# EAGLE board fitnessband (EAGLE 7.4.0)
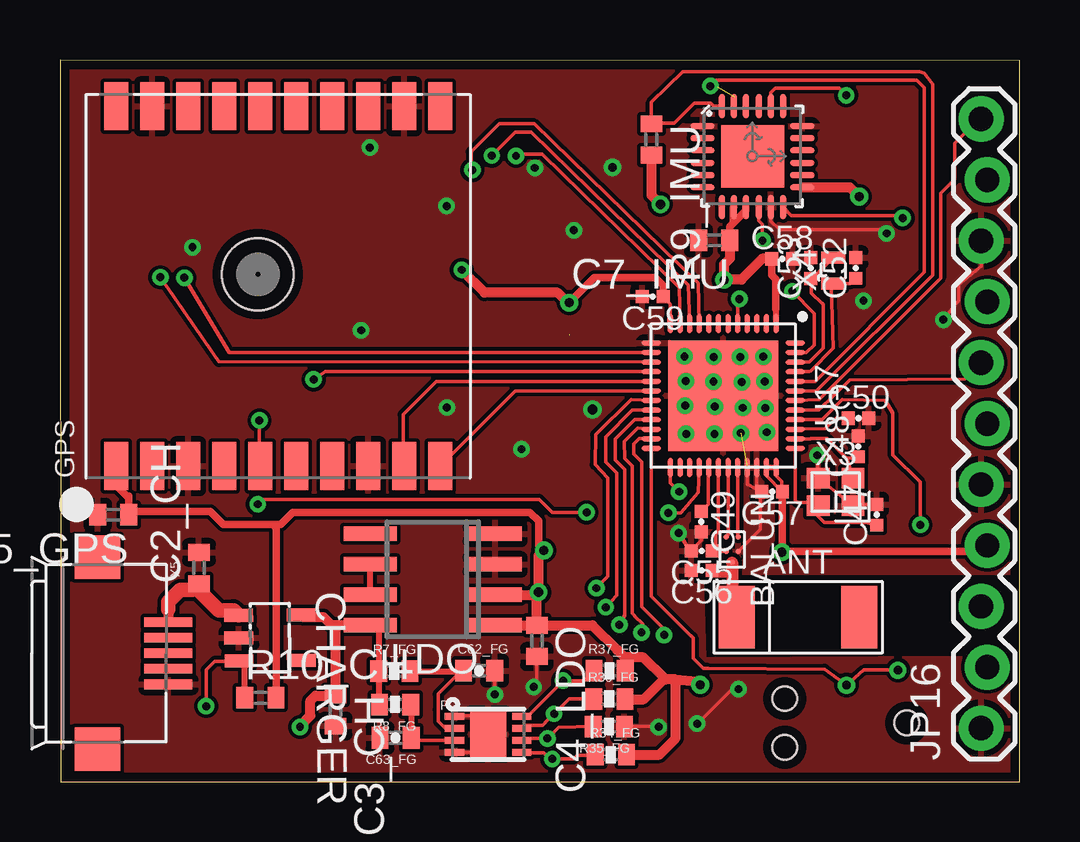
[diagram p0: board, top side]
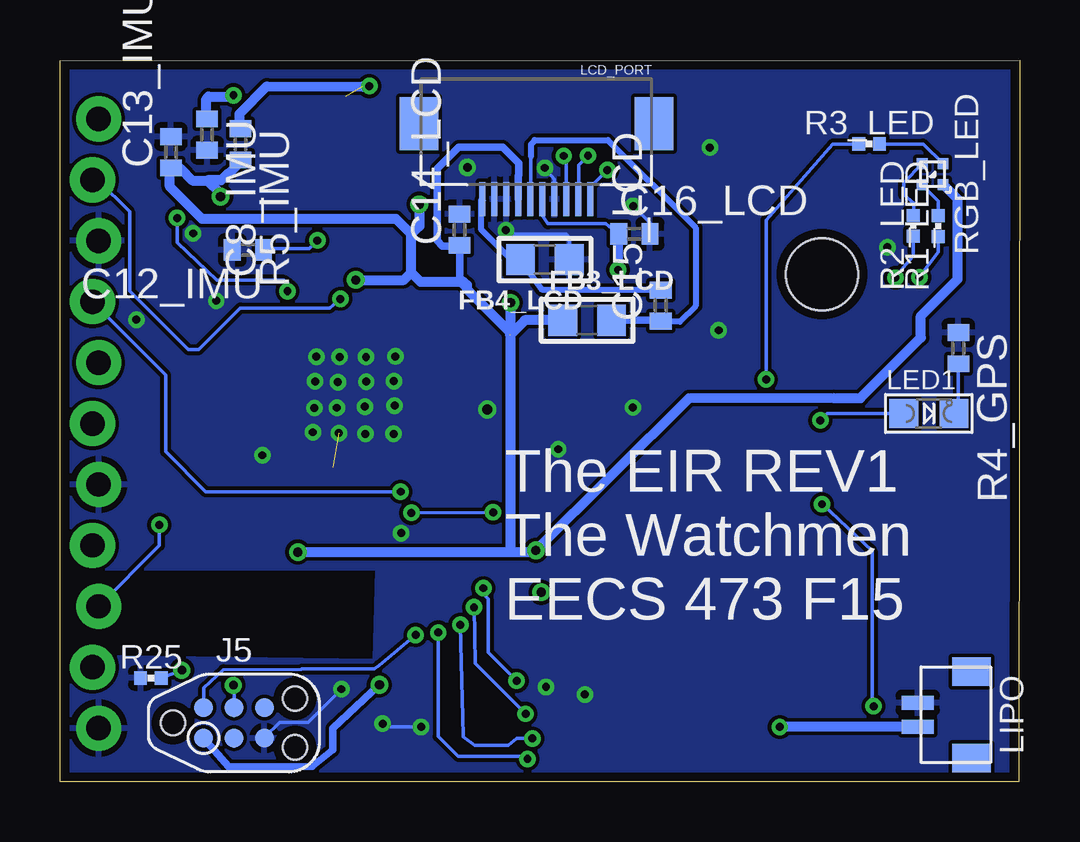
[diagram p1: board, bottom side, seen from below]

Size 39.99 x 30.09 mm. Coordinates in mm from the lower left corner, seen from the top.
Outline: 0.04,0 39.98,0 39.99,30.06 0,30.09 0.04,0
Copper layers (1*16): Top 0.0356mm / dielectric 1.5011mm / Bottom 0.0356mm
Design rules "LaenPCBOrder": minimum track width 6mil, minimum drill 13mil, track to track 6mil, track to pad 6mil, pad to pad 6mil, via to via 6mil, smd to smd 6mil, copper to edge 15mil, drill to drill 6mil, minimum pad ring 7mil, minimum via ring 7mil, stop-mask expansion 3mil, vias tented up to drill 0mil, thermal gap 10mil

## Footprints (pad centres in the part's own frame; a part is rotated, then mirrored left to right if it is on the bottom)
FRACTUS-ANTENNA-FR05-S1-N-0-102 = smd 1.5 x 2.6: 1 -2.55,0; 2 2.55,0
BAL-NRF01D3 = smd 0.22 x 0.22: ANT1 -0.537,-0.25; ANT2 -0.537,0.25; GND 0.069,0.25; SE 0.537,0; VCC 0.069,-0.25
C0402 = smd 0.7 x 0.9: 1 -0.65,0; 2 0.65,0
0402_CAP = smd 0.536 x 0.546: 1 -0.433,0; 2 0.433,0
0402-CAP = smd 0.7 x 0.9: 1 -0.65,0; 2 0.65,0
SOT23-5L = smd 0.55 x 1.2: 1 -0.95,-1.3; 2 0,-1.3; 3 0.95,-1.3; 4 0.95,1.3; 5 -0.95,1.3
_0805 = smd 1.2 x 1.3: 1 -1.016,0; 2 1.016,0
TDFN-8 = smd 0.8 x 0.3: 1 -1.4,0.75; 2 -1.4,0.25; 3 -1.4,-0.25; 4 -1.4,-0.75; 5 1.4,-0.75; 6 1.4,-0.25; 7 1.4,0.25; 8 1.4,0.75 | smd 1.5 x 1.88: EP 0,0
FGPMMOPA6H = smd 2 x 1: P$1 -7.5,6.75; P$2 -7.5,5.25; P$3 -7.5,3.75; P$4 -7.5,2.25; P$5 -7.5,0.75; P$6 -7.5,-0.75; P$7 -7.5,-2.25; P$8 -7.5,-3.75; P$9 -7.5,-5.25; P$10 -7.5,-6.75; P$11 7.5,-6.75; P$12 7.5,-5.25; P$13 7.5,-3.75; P$14 7.5,-2.25; P$15 7.5,-0.75; P$16 7.5,0.75; P$17 7.5,2.25; P$18 7.5,3.75; P$19 7.5,5.25; P$20 7.5,6.75 | hole 3: 0.5,0.85
QFN-24-4MM2 = smd 1.016 x 0.254: 1 -2.066,1.257; 2 -2.066,0.75; 3 -2.066,0.247; 4 -2.066,-0.287; 5 -2.066,-0.792; 6 -2.066,-1.297; 13 2.086,-1.297; 14 2.086,-0.792; 15 2.086,-0.287; 16 2.086,0.247; 17 2.086,0.75; 18 2.086,1.257 | smd 0.254 x 1.016: 7 -1.267,-2.122; 8 -0.762,-2.122; 9 -0.258,-2.122; 10 0.278,-2.122; 11 0.78,-2.122; 12 1.287,-2.122; 19 1.287,2.082; 20 0.78,2.082; 21 0.278,2.082; 22 -0.258,2.082; 23 -0.762,2.082; 24 -1.267,2.082 | smd 2.616 x 2.616: P$1 0.02,-0.01
TC2030-IDC-NL = smd 0.787 x 0.787: 1 -1.27,-0.635; 2 -1.27,0.635; 3 0,-0.635; 4 0,0.635; 5 1.27,-0.635; 6 1.27,0.635 | hole 1.016: -2.54,0; 2.54,1.016; 2.54,-1.016
1X11_LOCK = drill 1.016 pad 1.88: 1 0,0.127; 2 2.54,-0.127; 3 5.08,0.127; 4 7.62,-0.127; 5 10.16,0.127; 6 12.7,-0.127; 7 15.24,0.127; 8 17.78,-0.127; 9 20.32,0.127; 10 22.86,-0.127; 11 25.4,0.127
FPC_10PIN_52892-1095 = smd 0.25 x 1.4: P$1 -2.25,0; P$2 -1.75,0; P$3 -1.25,0; P$4 -0.75,0; P$5 -0.25,0; P$6 0.25,0; P$7 0.75,0; P$8 1.25,0; P$9 1.75,0; P$10 2.25,0 | smd 1.6 x 2.2: SUPPORT1 -4.9,-3.15; SUPPORT2 4.9,-3.15
SO08 = smd 0.6 x 2.2: 1 -1.905,-2.6; 2 -0.635,-2.6; 3 0.635,-2.6; 4 1.905,-2.6; 5 1.905,2.6; 6 0.635,2.6; 7 -0.635,2.6; 8 -1.905,2.6
CHIPLED_0805 = smd 1.2 x 1.2: A 0,-1.05; C 0,1.05
SH-1X2/1MM = smd 0.6 x 1.35: 1 -0.5,0.1; 2 0.5,0.1 | smd 1.2 x 1.6: SUPPORT1 -1.8,2.335; SUPPORT2 1.8,2.335
0402_RES = smd 0.536 x 0.546: 1 -0.433,0; 2 0.433,0
R0402 = smd 0.7 x 0.9: 1 -0.65,0; 2 0.65,0
0402-RES = smd 0.7 x 0.9: 1 -0.65,0; 2 0.65,0
1MM_SQ_4PAD = smd 0.457 x 0.457: 1 0.432,0.432; 2 0.432,-0.432; 3 -0.432,-0.432; 4 -0.432,0.432
QFN-48-6MM = smd 0.8 x 0.203: 1 -3,2.2; 2 -3,1.8; 3 -3,1.4; 4 -3,1; 5 -3,0.6; 6 -3,0.2; 7 -3,-0.2; 8 -3,-0.6; 9 -3,-1; 10 -3,-1.4; 11 -3,-1.8; 12 -3,-2.2; 25 3,-2.2; 26 3,-1.8; 27 3,-1.4; 28 3,-1; 29 3,-0.6; 30 3,-0.2; 31 3,0.2; 32 3,0.6; 33 3,1; 34 3,1.4; 35 3,1.8; 36 3,2.2 | smd 0.203 x 0.8: 13 -2.2,-3; 14 -1.8,-3; 15 -1.4,-3; 16 -1,-3; 17 -0.6,-3; 18 -0.2,-3; 19 0.2,-3; 20 0.6,-3; 21 1,-3; 22 1.4,-3; 23 1.8,-3; 24 2.2,-3; 37 2.2,3; 38 1.8,3; 39 1.4,3; 40 1,3; 41 0.6,3; 42 0.2,3; 43 -0.2,3; 44 -0.6,3; 45 -1,3; 46 -1.4,3; 47 -1.8,3; 48 -2.2,3 | smd 4.6 x 4.6: GND 0,0
FA-128 = smd 0.95 x 0.85: 1 -0.725,-0.575; 2 0.725,-0.575; 3 0.725,0.575; 4 -0.725,0.575
ABS05 = smd 0.5 x 1: A -0.55,0; B 0.55,0
USB-MICROB = smd 0.4 x 2: D+ 0,3.1; D- -0.65,3.1; GND 1.3,3.1; ID 0.65,3.1; VBUS -1.3,3.1 | smd 1.8 x 1.9: GND@2 -4,0.15; GND@3 4,0.15

## Placement (x,y rotation side)
ANT  FRACTUS-2.4GHZ-FR05-S1-N-0-102  [FRACTUS-ANTENNA-FR05-S1-N-0-102]  30.75,6.86 0 top
BALUN  BAL-NRF01D3  [BAL-NRF01D3]  28,9.68 270 top
C2_CH  1uF  [C0402]  5.79,8.91 90 top
C3_CH  1uF  [C0402]  11.48,2.97 270 top
C4_LDO  [C0402]  19.87,5.87 270 top
C5_GPS  0.1uF  [C0402]  2.22,11.13 180 top
C7_IMU  10nF  [C0402]  27.26,22.57 180 top
C8_IMU  2.2uF  [C0402]  33.86,26.98 270 bottom
C12_IMU  0.1uF  [C0402]  32.16,22.17 180 bottom
C13_IMU  0.1uF  [C0402]  35.37,26.24 90 bottom
C14_LCD  1uF  [C0402]  23.34,23.01 90 bottom
C15_LCD  1uF  [C0402]  14.96,19.85 90 bottom
C16_LCD  0.1uF  [C0402]  16.06,22.84 0 bottom
C47  12pF  [0402_CAP]  34.02,11.13 90 top
C48  12pF  [0402_CAP]  33.26,13.98 90 top
C49  47nF  [0402_CAP]  26.72,10.84 270 top
C50  1nF  [0402_CAP]  33.27,15.15 0 top
C52  12pF  [0402_CAP]  33.16,21.42 90 top
C53  12pF  [0402_CAP]  31.28,21.41 90 top
C55  2.2nF  [0402_CAP]  26.73,9.63 180 top
C56  0.8pF  [0402_CAP]  26.73,8.81 180 top
C57  1nF  [0402_CAP]  29.67,12.09 180 top
C58  100nF  [0402_CAP]  30.09,21.8 0 top
C59  100nF  [0402_CAP]  24.7,20.22 180 top
C62_FG  1uF  [0402-CAP]  17.46,4.63 0 top
C63_FG  10nF  [0402-CAP]  13.98,1.83 180 top
CHARGER  MAX1555  [SOT23-5L]  8.75,6 270.5 top
FB3_LCD  [_0805]  18.03,19.24 0 bottom
FB4_LCD  [_0805]  19.79,21.77 180 bottom
FG  MAX1704X  [TDFN-8]  17.84,1.98 0 top
GPS  FGPMMOPA6H  [FGPMMOPA6H]  9.09,20.66 90 top
IMU  MPU-6050-1  [QFN-24-4MM2]  28.84,26.08 0 top
J5  TC2030-JLINK-NL  [TC2030-IDC-NL]  32.74,2.45 0 bottom
JP16  M11LOCK  [1X11_LOCK]  38.51,2.23 90 top
LCD_PORT  LS013B4DN04  [FPC_10PIN_52892-1095]  20.14,24.29 180 bottom
LDO  LP2951M  [SO08]  15.53,8.43 90 top
LED1  FIX  [CHIPLED_0805]  3.79,15.35 270 bottom
LIPO  SH_MALE_2/1MM  [SH-1X2/1MM]  4.35,2.79 270 bottom
R1_LED  1k  [0402_RES]  3.4,23.16 90 bottom
R2_LED  1k  [0402_RES]  4.43,23.18 90 bottom
R3_LED  1k  [0402_RES]  6.28,26.59 0 bottom
R4_GPS  1K  [R0402]  2.56,18.07 270 bottom
R5_IMU  10K  [R0402]  32.47,26.57 270 bottom
R7_FG  1k  [0402-RES]  13.93,4.61 0 top
R8_FG  180  [0402-RES]  13.96,3.22 180 top
R9_IMU  10K  [R0402]  24.64,26.77 270 top
R10_CH  100K  [R0402]  8.35,3.5 0 top
R25  12k  [0402_RES]  36.2,4.32 0 bottom
R34_FG  4.7k  [0402-RES]  22.95,1.13 0 top
R35_FG  4.7k  [0402-RES]  22.87,2.3 180 top
R36_FG  4.7k  [0402-RES]  22.89,3.45 0 top
R37_FG  4.7k  [0402-RES]  22.9,4.63 0 top
RGB_LED  SML-LX0404SIUPGUSB  [1MM_SQ_4PAD]  3.63,25.33 270 bottom
U17  NRF51822QF  [QFN-48-6MM]  27.63,16.09 270 top
X3  EPSON-FA-128  [FA-128]  32.32,12.08 0 top
X4  ABS05-32.768KHZ-T  [ABS05]  32.22,21.31 90 top
X5  USB-MICROB  [USB-MICROB]  1.42,5.36 270 top

## Library data of the parts
ANT = chips; RICHARDSON_RFPD: FR05-S1-N-0102B
BALUN = chips; DIGIKEY: 497-13637-1-ND; MOUSER: 511-BAL-NRF01D3
C2_CH C3_CH C4_LDO C5_GPS C7_IMU C8_IMU C12_IMU C13_IMU C14_LCD C15_LCD C16_LCD R4_GPS R5_IMU R9_IMU R10_CH = resistor
C47-C50 C52 C53 C55-C59 R1_LED R2_LED R3_LED R25 = passives
C62_FG C63_FG FG JP16 R7_FG R8_FG R34_FG R35_FG R36_FG R37_FG X5 = SparkFun
CHARGER = maxim; MF: MAXIM; MPN: MAX1555EZK+T; OC_FARNELL: 1628222; OC_NEWARK: 59J2761
FB3_LCD FB4_LCD GPS LCD_PORT LED1 = microbuilder
IMU = Testing
J5 = connector
LDO = national-semiconductor; MF: FAIRCHILD SEMICONDUCTOR; MPN: LP2951CM; OC_FARNELL: 9488561; OC_NEWARK: 78K6014
LIPO = headers; DIGIKEY: 455-1788-2-ND
RGB_LED = leds; DIGIKEY: 67-2125-1-ND
U17 = chips; DIGIKEY: 1490-1032-1-ND; MOUSER: 949-NRF51822-QFAB-R7
X3 = crystals
X4 = crystals; DIGIKEY: 535-11899-1-ND

## Nets
3.3V: C4_LDO.1 C5_GPS.1 C7_IMU.1 C13_IMU.1 C14_LCD.1 C16_LCD.1 C57.1 C58.1 C59.1 FB3_LCD.1 GPS.P$1 IMU.8 IMU.9 IMU.13 J5.1 JP16.4 LCD_PORT.P$5 LCD_PORT.P$7 LDO.1 LDO.2 R5_IMU.2 R9_IMU.2 R10_CH.2 R34_FG.2 R36_FG.2 R37_FG.2 RGB_LED.1 U17.1 U17.12 U17.35 U17.36
AGLCD: C15_LCD.2 FB4_LCD.2 LCD_PORT.P$10
ALCD: C15_LCD.1 FB3_LCD.2 LCD_PORT.P$6
ALT_FG: FG.5 R34_FG.1 U17.22
ANTENNA1: ANT.1 BALUN.SE C56.1
BATTERY: C3_CH.1 CHARGER.5 LDO.8 LIPO.2 R7_FG.1 R8_FG.2
BUTTON1: JP16.11 U17.42
BUTTON2: JP16.7 U17.41
BUTTON3: JP16.3 U17.40
CHARGING?: CHARGER.3 R10_CH.1 U17.28
FIX: GPS.P$5 LED1.A
GND: BALUN.GND C2_CH.2 C3_CH.2 C4_LDO.2 C5_GPS.2 C7_IMU.2 C8_IMU.2 C12_IMU.2 C13_IMU.2 C14_LCD.2 C16_LCD.2 C47.2 C48.2 C49.2 C50.2 C52.2 C53.2 C55.2 C56.2 C57.2 C58.2 C59.2 C62_FG.2 C63_FG.2 CHARGER.2 FB4_LCD.1 FG.1 FG.4 FG.EP GPS.P$3 GPS.P$8 GPS.P$12 GPS.P$19 IMU.1 IMU.11 IMU.18 J5.5 JP16.1 JP16.5 JP16.9 LCD_PORT.P$4 LCD_PORT.P$8 LCD_PORT.P$9 LDO.3 LDO.4 LIPO.1 R4_GPS.1 R25.1 R35_FG.1 U17.13 U17.33 U17.34 U17.GND X3.2 X3.4 X5.GND
GPIO1: JP16.8 U17.25
HR: JP16.10 U17.5
INT_IMU: IMU.12 U17.47
LED_BLUE: R2_LED.1 U17.14
LED_GREEN: R3_LED.1 U17.16
LED_RED: R1_LED.1 U17.15
N$1: R1_LED.2 RGB_LED.2
N$2: R3_LED.2 RGB_LED.4
N$3: R2_LED.2 RGB_LED.3
N$4: LDO.6 LDO.7
N$23: LED1.C R4_GPS.2
N$25: C47.1 U17.37 X3.1
N$26: C48.1 U17.38 X3.3
N$27: C49.1 U17.29
N$28: C52.1 U17.45 X4.A
N$29: C53.1 U17.46 X4.B
N$32: C50.1 U17.39
N$33: BALUN.ANT1 U17.31
N$34: BALUN.ANT2 U17.32
N$35: BALUN.VCC C55.1 U17.30
N$47: C62_FG.1 FG.2 R7_FG.2
N$48: C8_IMU.1 IMU.20
N$49: C12_IMU.1 IMU.10
QST_FG: FG.6 R35_FG.2 U17.21
RX_GPS: GPS.P$10 U17.18
SCL_FG: FG.7 R36_FG.1 U17.20
SCL_IMU: IMU.23 R5_IMU.1 U17.44
SCLK_LCD: LCD_PORT.P$1 U17.9
SCS_LCD: LCD_PORT.P$3 U17.11
SDA_FG: FG.8 R37_FG.1 U17.19
SDA_IMU: IMU.24 R9_IMU.1 U17.43
SI_LCD: LCD_PORT.P$2 U17.10
SWDCLK: J5.4 R25.2 U17.24
SWDIO/!RESET: J5.2 U17.23
TX_GPS: GPS.P$9 U17.17
USB_PORT: C2_CH.1 CHARGER.1 X5.VBUS
VDD: C63_FG.1 FG.3 R8_FG.1

## Tracks (layer width: path | path; a pad name or v marks a point on that pad's centre or on a via)
3.3V  (via drill 0.33, 0.38)  (1 unrouted)
  Top 0.152: U17.35 29.43,12.76 C57.1 | U17.36 29.84,12.76 30.08,12.51 30.08,12.12 C57.1 30.1,12.07 | 25.43,19.32 25.43,19.92 C59.1 | 29.84,19.7 29.83,19.71 | 27.7,20.95 v27.67,20.92 v27.68,20.93
  Top 0.229: U17.36 U17.35 | 23.21,5.49 23.25,5.49 | 24.23,3.44 R36_FG.2
  Top 0.254: U17.12 25.43,19.32 | 25.2,20.15 C59.1 | U17.1 29.84,19.7
  Top 0.305: v20.16,9.64 19.94,9.86 19.94,10.87 19.58,11.23 9.7,11.23 9.2,10.73 8.86,10.73 | 8.86,10.73 6.8,10.73 6.27,11.26 2.87,11.26 C5_GPS.1 2.87,11.91 2.78,11.91 2.4,12.29 2.4,13.1 GPS.P$1 | R10_CH.2 9,10.59 8.86,10.73 | C59.1 25.13,20.69 24.8,21.02 22.27,21.02 v21.22,19.97 | 29.83,19.71 29.83,20.95 29.66,21.12 C58.1 | C57.1 30.1,9.59 | 30.1,9.59 v30.08,9.57 | 30.1,9.59 38.38,9.59 JP16.4 | C7_IMU.1 27.91,23.14 28.06,23.29 | 28.06,23.29 28.06,23.94 IMU.8 | IMU.9 28.58,23.81 28.06,23.29
  Top 0.406: v21.22,19.97 21.15,19.97 20.73,20.39 17.69,20.39 v16.74,21.34 | LDO.1 C4_LDO.1 | C4_LDO.1 22.18,6.52 23.21,5.49 | LDO.2 19.84,7.79 v19.94,7.9 | C4_LDO.1 19.86,7.83 v19.94,7.9 | v19.94,7.9 19.94,9.42 v20.16,9.64 | R34_FG.2 24.97,1.13 25.65,1.81 25.65,4.26 | 25.65,4.26 26.54,4.19 v26.68,4.04 | C58.1 29.26,21.8 28.39,20.93 v27.68,20.93 | 23.25,5.49 23.25,5.46 23.53,5.18 | 23.53,5.18 23.53,4.65 R37_FG.2 | 25.65,4.26 25.23,4.26 25.19,4.3 | 25.19,4.3 24.31,5.18 23.53,5.18 | R36_FG.2 24.33,3.44 25.19,4.3 | IMU.13 32.91,24.78 v33.3,24.39 | R9_IMU.2 24.64,24.45 v25.02,24.07 | v27.67,20.92 27.67,21.57 27.92,21.82 C7_IMU.1
  Bottom 0.152: C16_LCD.1 16.73,22.84 17.25,23.26 19.66,23.26 19.88,23.58 LCD_PORT.P$5 | 26.7,4.17 v26.68,4.04 | RGB_LED.1 3.2,24.86 | 35.12,25.59 C13_IMU.1 35.35,25.57
  Bottom 0.305: v26.68,4.04 28.62,2.22 28.62,1.33 29.48,0.65 32.95,0.63 J5.1 | 23.17,20.85 23.04,20.72 | 23.04,20.54 23.31,20.81 23.31,21.02 23.34,21.05 C14_LCD.1 23.36,22.34 24.06,22.34 24.28,22.56 24.28,25.55 23.37,26.46 21.55,26.46 20.87,25.78 20.87,25.28 20.89,25.26 LCD_PORT.P$7
  Bottom 0.406: FB3_LCD.1 20.63,19.24 20.63,19.23 21.23,18.63 | 21.23,18.64 21.23,18.73 23.04,20.54 23.04,20.72 | v21.22,19.97 v21.23,19.96 21.23,18.63 | v16.74,21.34 16.74,22.81 C16_LCD.1 | 25.35,21.23 24.97,20.85 23.17,20.85 | v27.67,20.92 25.66,20.92 25.35,21.23 | C13_IMU.1 35.41,25.55 35.41,24.8 34.07,23.46 25.98,23.46 25.35,22.83 | 35.35,25.57 34.98,25.57 34.47,25.06 33.85,25.06 | 33.85,25.06 33.84,25.07 33.28,25.07 33.02,25.33 32.97,25.33 32.47,25.83 R5_IMU.2 | v30.08,9.57 21.28,9.57 | 21.28,9.57 20.23,9.57 v20.16,9.64 13.79,15.98 7.75,15.99 6.64,15.99 4.12,18.51 4.12,19.42 2.59,20.95 2.59,24.29 RGB_LED.1 | 21.23,18.63 21.23,9.62 21.28,9.57 | 25.35,21.23 25.35,22.83 | v33.3,24.39 33.3,24.51 33.85,25.06 | v25.02,24.07 25.02,23.16 25.35,22.83
AGLCD
  Bottom 0.152: 22.32,24.22 LCD_PORT.P$10 22.44,24.24 | FB4_LCD.2 21.19,21.77
  Bottom 0.254: C15_LCD.2 19.89,20.5 FB4_LCD.2 | 21.19,21.77 22.44,23.02 22.44,24.24
ALCD
  Bottom 0.152: 14.91,19.15 C15_LCD.1 | 20.37,26.07 20.37,24.31 LCD_PORT.P$6
  Bottom 0.254: C15_LCD.1 14.94,19.18 14.16,19.18 13.51,19.83 13.51,23.1 17.16,26.75 20.21,26.75 20.21,26.72 20.37,26.56 20.37,26.07
  Bottom 0.305: FB3_LCD.2 15,19.24 C15_LCD.1
ALT_FG  (via drill 0.33)
  Top 0.152: U17.22 24.07,14.74 23.51,14.18 23.53,13.48 23.84,13.17 23.84,7.02 23.95,6.91 23.95,6.9 24.28,6.57 24.28,6.27 v24.23,6.22 | R34_FG.1 22.28,1.11 21.56,1.11 21.4,0.95 v20.51,0.95 20.41,0.95 20.16,1.2 19.27,1.2 FG.5
  Bottom 0.152: v24.23,6.22 24.23,1.89 23.39,1.05 20.61,1.05 v20.51,0.95
ANTENNA1
  Top 0.254: C56.1 27.17,8.65 28,8.65
  Top 0.5: BALUN.SE 28,8.65 28,7.06 ANT.1
BATTERY  (via drill 0.33)
  Top 0.152: LDO.8 13.28,6.53
  Top 0.254: 13.28,6.53 R7_FG.1 13.28,3.25 R8_FG.2
  Top 0.406: 11.31,6.53 10.98,6.86 10.14,6.86 CHARGER.5 | 11.31,6.53 LDO.8 | v10,2.28 10,2.33 10.43,2.76 10.43,3.38 10.64,3.59 11.45,3.59 C3_CH.1 11.48,6.36 11.31,6.53
  Bottom 0.406: LIPO.2 v9.99,2.29 v10,2.28
BUTTON1
  Top 0.152: JP16.11 38.29,27.63 37.29,26.63 37.29,25.13 36.69,24.53 36.69,21 31.63,15.94 30.68,15.89 U17.42
BUTTON2
  Top 0.152: U17.41 31.61,15.49 32.91,16.75 37.7,16.79 JP16.7
BUTTON3  (via drill 0.33)
  Top 0.152: U17.40 31.76,15.1 32.6,15.93 34.38,15.89 34.69,15.37 34.7,13.63 35.84,12.49 v35.84,10.72 v35.85,10.71
  Bottom 0.152: v35.85,10.71 35.85,9.84 JP16.3
CHARGING?  (via drill 0.33)
  Top 0.152: 7.6,4.91 CHARGER.3 7.38,5.04 7.36,5.02 6.45,5.02 6.09,4.66 v6.09,3.15 | U17.28 26.59,12.06 25.87,11.21 v25.35,11.21 | v21.94,11.23 20.5,11.23 19.96,11.77 8.44,11.77 v8.24,11.57
  Top 0.254: R10_CH.1 7.7,4.8 CHARGER.3
  Bottom 0.152: v25.35,11.21 v21.94,11.23 | v8.24,11.57 v8.23,11.57 6.15,9.62 6.15,3.21 v6.09,3.15
FIX  (via drill 0.33)
  Top 0.152: v8.31,15.06 8.31,13.19 GPS.P$5
  Bottom 0.152: LED1.A 8.02,15.35 v8.31,15.06
GND  (via drill 0.33, 0.36, 0.41)  (1 unrouted)
  Top 0.152: C47.2 32.79,11.52 X3.2 X3.4 31.56,13.46 v31.56,13.61 | U17.34 29.04,12.89 29.03,12.89 29.03,12.3 C57.2 | C62_FG.2 v18.11,3.65 v18.12,3.64 | FG.4 17.23,1.23 17.32,1.32 17.32,2.73 17.33,2.74 FG.1 | BALUN.GND 29.17,10.52 29.17,12.1 29.06,12.21 29.06,12.31 C57.2 | C49.2 26.72,10.05 C55.2 26.19,9.71 v25.78,10.37 | JP16.9 38.38,21.5 37.45,20.73 37.45,20.06 v36.81,19.26 | v28.27,3.86 27.99,3.86 v26.55,2.42 | C4_LDO.2 19.87,4.08 v19.74,3.95 | R35_FG.1 24.92,2.3 v24.94,2.28 | 28.63,12.73 28.63,12.39 28.64,12.44 28.65,12.39 C57.2 | IMU.11 29.62,23.38 29.99,23.01 34.29,23.01 v34.44,22.86
  Bottom 0.152: 18.8,21.8 FB4_LCD.1 18.77,22.7 18.9,22.83 21.25,22.83 v21.41,22.99 21.39,23.01 | v18.12,3.64 18.12,3.66 | J5.5 31.47,1.85 30.84,2.48 29.65,2.48 v28.27,3.86 | 26.59,2.33 26.55,2.37 v26.55,2.42 26.41,2.28 v24.94,2.28 | LCD_PORT.P$4 19.39,25.12 v19.79,25.59 | C16_LCD.2 15.41,23.3 v16.11,24
  other vias: 5.52,22.28 12.55,18.82 12.91,26.44 19.23,13.86 26.02,17.73 16.12,15.6 27.24,17.71 28.34,17.71 29.31,17.72 29.36,16.69 29.39,15.58 29.45,14.57 28.41,16.66 28.45,15.59 28.37,14.53 27.23,16.68 27.29,15.64 27.27,14.5 26.09,14.5 26.05,15.68 26.08,16.7 22.19,15.52 23.02,25.61 33.48,20.05
  pour Top: -0.46,30.92 41.27,30.92 41.23,8.68 26.76,8.66 26.87,5.13 41.32,5.21 41.39,-0.85 -0.65,-0.93
  pour Bottom: -1.04,31.45 41.73,31.45 41.68,8.88 26.79,8.85 26.89,5.05 41.75,5.26 41.7,-1.57 -1.04,-1.75
GPIO1  (via drill 0.33)
  Top 0.152: U17.25 25.43,12.46 v25.8,12.09
  Bottom 0.152: v25.8,12.09 33.92,12.09 35.59,13.76 35.59,16.96 JP16.8
HR  (via drill 0.33)
  Top 0.152: U17.5 28.23,20.11 v28.31,20.13
  Bottom 0.152: JP16.10 38.42,25.09 37.09,23.76 37.09,20.46 34.64,18.01 34.21,18.01 32.47,19.75 28.75,19.75 v28.31,20.13
INT_IMU  (via drill 0.33)
  Top 0.152: U17.47 31.1,17.89 31.42,18.21 31.42,19.52 v30.51,20.45 | v35.11,23.5 35.11,23.53 35.03,23.61 30.47,23.61 IMU.12
  Bottom 0.152: v30.51,20.45 30.5,20.79 30.66,20.91 33.45,20.92 35.11,22.47 v35.11,23.5
LED_BLUE  (via drill 0.33)
  Top 0.152: U17.14 7.06,17.89 v5.18,21.01
  Bottom 0.152: v5.18,21.01 4.75,21.55 4.44,21.91 4.44,22.74 R2_LED.1
LED_GREEN  (via drill 0.33)
  Top 0.152: U17.16 11.05,17.09 v10.57,16.77
  Bottom 0.152: v10.57,16.77 10.57,23.42 7.79,26.59 R3_LED.1
LED_RED  (via drill 0.33)
  Top 0.152: U17.15 6.62,17.51 v4.18,21.03
  Bottom 0.152: v4.18,21.03 3.4,22.08 R1_LED.1
N$1
  Bottom 0.152: RGB_LED.2 4.06,24.87 3.4,24.21 R1_LED.2
N$2
  Bottom 0.152: R3_LED.2 4.03,26.59 RGB_LED.4
N$3
  Bottom 0.152: R2_LED.2 4.42,24.12 4.84,24.47 4.84,24.98 RGB_LED.3
N$4
  Top 0.254: LDO.7 LDO.6
N$23
  Bottom 0.152: R4_GPS.2 2.56,15.53 LED1.C
N$25
  Top 0.152: C47.1 33.56,10.81 31.84,10.81 31.32,11.32 X3.1 31.19,11.64 30.73,11.64 30.63,11.73 U17.37
N$26
  Top 0.152: U17.38 31.26,14.29 31.28,14.31 31.96,14.3 32.77,13.49 32.75,13.5 | 32.75,13.5 33.26,13.5 C48.1 | X3.3 32.77,13.47 32.75,13.5
N$27
  Top 0.152: U17.29 27.02,12.88 27.02,11.56 C49.1
N$28
  Top 0.152: U17.45 31.22,17.1 31.28,17.13 31.29,17.13 32.22,18.07 32.13,20.67 X4.A 32.93,20.76 C52.1
N$29
  Top 0.152: X4.B 31.34,20.98 C53.1 31.31,20.95 31.31,20.38 31.76,19.93 31.78,19.93 31.8,19.91 31.8,18.09 31.21,17.5 31.2,17.5 31.19,17.49 U17.46
N$32
  Top 0.152: C50.1 32.32,15.15 31.89,14.72 30.65,14.71 U17.39
N$33
  Top 0.152: U17.31 27.84,10.29 BALUN.ANT1
N$34
  Top 0.152: U17.32 28.23,10.23 BALUN.ANT2
N$35
  Top 0.152: C55.1 | BALUN.VCC 27.19,9.61 C55.1 | U17.30 27.43,10.41 27.32,10.3 27.32,9.78 C55.1
N$47
  Top 0.152: 16.81,4.61 C62_FG.1 16.72,4.63 15.75,3.66 15.75,3.01 15.76,3 15.77,2.51 16.05,2.23 FG.2
  Top 0.254: R7_FG.2 16.79,4.61 C62_FG.1
N$48  (via drill 0.33)
  Top 0.152: v32.76,28.62 32.46,28.92 29.81,28.92 29.62,28.73 IMU.20 | IMU.20
  Bottom 0.152: 33.89,27.66 C8_IMU.1
  Bottom 0.406: 33.89,27.66 33.89,28.47 33.8,28.56 32.82,28.56 v32.76,28.62
N$49  (via drill 0.33)
  Top 0.152: IMU.10 29.12,23.4 29.27,23.25 v29.27,22.56
  Bottom 0.152: C12_IMU.1 31.45,22.23 29.6,22.23 v29.27,22.56
QST_FG  (via drill 0.33)
  Top 0.152: U17.21 23.94,15.09 23.14,14.29 23.14,13.41 23.53,13.02 23.53,6.94 v23.31,6.54 | R35_FG.2 20.79,2.26 v20.31,1.8 19.31,1.8 FG.6
  Bottom 0.152: v23.31,6.54 23.19,1.91 23.19,1.88 22.71,1.52 21.31,1.52 20.95,1.81 20.4,1.81 v20.31,1.8
RX_GPS
  Top 0.152: U17.18 18.97,16.29 GPS.P$10
SCL_FG  (via drill 0.33)
  Top 0.152: U17.20 23.84,15.49 22.73,14.38 22.73,13.33 23.19,12.87 23.19,7.77 v22.74,7.27 | FG.7 19.36,2.35 20.12,2.35 20.22,2.45 20.22,2.47 v20.58,2.83 v20.59,2.83 21.21,3.45 R36_FG.1
  Bottom 0.152: v22.74,7.27 22.69,4.93 v20.59,2.83
SCL_IMU  (via drill 0.33)  (1 unrouted)
  Top 0.152: U17.44 31.46,16.69 36.01,21.24 36.01,28.93 35.69,29.25 29.75,29.24 27.34,29.24 v27.1,29 | IMU.23 28.1,28.18 28.1,28.56
  Bottom 0.406: R5_IMU.1 32.52,27.27 32.52,27.84 31.37,28.99 27.39,28.98 27.12,28.98 v27.1,29
SCLK_LCD  (via drill 0.33)
  Top 0.152: U17.9 26.59,20.8 19.75,27.43 18.3,27.43 17.13,26.26 17.13,25.55 v17.18,25.5
  Bottom 0.152: LCD_PORT.P$1 17.9,24.78 v17.18,25.5
SCS_LCD  (via drill 0.33)
  Top 0.152: U17.11 25.8,20.59 20.1,26.17 19.08,26.17 v19,26.09
  Bottom 0.152: LCD_PORT.P$3 18.89,25.98 v19,26.09
SDA_FG  (via drill 0.33)
  Top 0.152: U17.19 23.79,15.92 22.32,14.47 22.3,13.22 22.83,12.67 22.83,8.55 v22.35,8.07 | R37_FG.1 21.83,4.21 v20.96,4.21 19.48,2.73 FG.8
  Bottom 0.152: v22.35,8.07 22.35,7.83 22.15,7.63 22.15,5.4 v20.96,4.21
SDA_IMU
  Top 0.152: U17.43 31.5,16.29 36.37,21.13 36.37,29.09 36.01,29.54 35.82,29.6 26.94,29.6 26.87,29.61 25.95,29.61 24.64,28.32 R9_IMU.1 24.68,27.46 25.6,27.46 26.43,28.29 27.11,28.29 27.24,28.16 IMU.24
SI_LCD  (via drill 0.33)
  Top 0.152: U17.10 26.18,20.7 19.64,27.08 18.97,27.08 v17.99,26.1
  Bottom 0.152: LCD_PORT.P$2 18.38,25.71 v17.99,26.1
SWDCLK  (via drill 0.36)
  Top 0.152: U17.24 24.63,7.72 26.29,6.07 26.3,6.07 26.38,5.99 26.38,5.15 26.81,4.72 27,4.72 31.86,4.69 32.69,4.07 v32.77,4.02 33.49,4.66 v34.9,4.66 v34.91,4.65
  Top 0.254: U17.24 24.38,13.89
  Bottom 0.152: R25.2 v34.91,4.65 | v32.77,4.02 32.74,3.91 J5.4
SWDIO/!RESET  (via drill 0.33)
  Top 0.152: v25.17,6.12 25.13,6.39 24.23,7.29 24.23,13.34 23.91,13.66 23.91,14.08 24.13,14.3 U17.23
  Bottom 0.152: J5.2 34,3.91 33.18,4.67 29.93,4.68 29.91,4.7 26.89,4.7 26.69,4.86 v25.17,6.12
TX_GPS
  Top 0.152: U17.17 16.37,16.68 15.68,16.68 14.3,15.3 14.3,13.2 GPS.P$9
USB_PORT
  Top 0.406: 4.5,7.18 4.5,6.68 X5.VBUS
  Top 0.61: CHARGER.1 7.23,7.15 6.62,7.15 5.79,7.98 C2_CH.1 5.52,7.99 5.01,7.99 4.52,7.5 4.52,7.2 4.5,7.18
VDD
  Top 0.152: 14.63,3.2 R8_FG.1 | FG.3 14.73,1.73 C63_FG.1
  Top 0.254: 14.63,3.2 C63_FG.1

## Text on the board
_bsilk: The EIR REV1 / The Watchmen / EECS 473 F15